# Altium PCB STM32F103RB最小系统.PcbDoc (part 2 of 2)
Units mil, origin at the board's own origin, x right, y up, seen from the top; angles counter-clockwise.
Board outline 1970 x 2120 mil, 2 copper layers (Top Layer, Bottom Layer); 27 components, 58 nets, 187 pads, 61 vias.
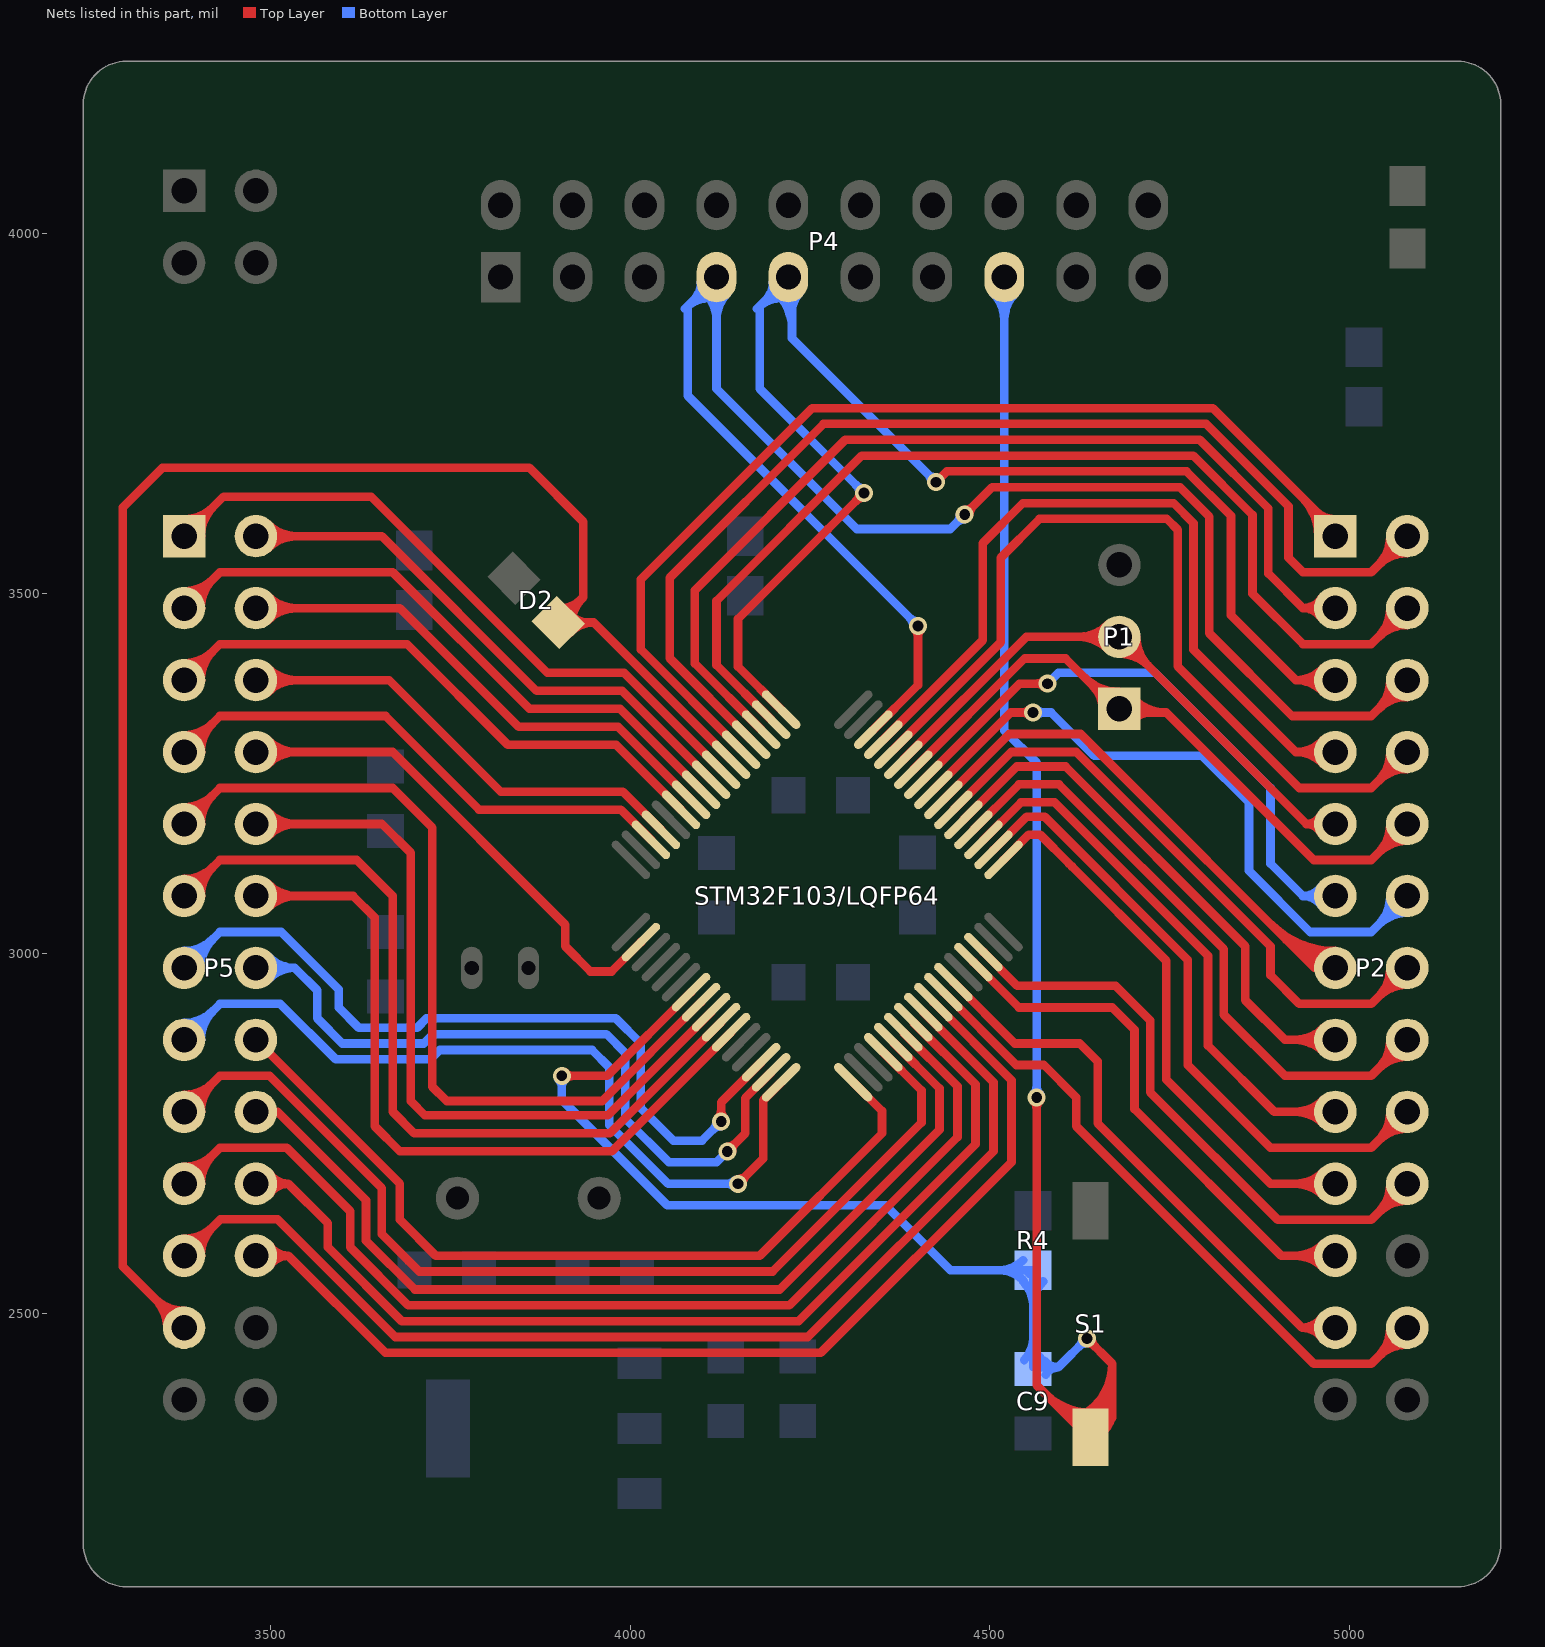
[diagram p2: the nets of this part, all layers, seen from the top]

## Via types
v1: diameter 25, hole 15, Top Layer to Bottom Layer, 61 vias

## Nets (pads, with @x,y where several pads share a name; then routed paths per layer and width w, separated by ;. In a path a pad name is that pad's centre, name@x,y a point inside that pad or via, vN(x,y) a via of type N, cw(c..) or ccw(c..) an arc to the next point about the centre after c; other vN are vias at no path point) (continued)
NRST: C9.2 P4.15 R4.1 S1.1 STM32F103/LQFP64.7 | length 4817.7
  Top Layer w12: v1(3905,2830) 3968.24,2830 STM32F103/LQFP64.7@4084.62,2946.37 ; v1(4565,2800) 4565,2400 4640,2325 4670,2355 4670,2430 ; v1(4635,2465) 4670,2430 ; 3920.69,2830 cw(c3920.69,2845.69) 3909.6,2834.6 ccw(c3920.69,2845.69) 3920.69,2830 ; 3920.69,2830 ccw(c3920.69,2814.31) 3909.6,2825.4 cw(c3920.69,2814.31) 3920.69,2830 ; 4565,2784.31 cw(c4580.69,2784.31) 4569.6,2795.4 ccw(c4580.69,2784.31) 4565,2784.31 ; 4565,2784.31 ccw(c4549.31,2784.31) 4560.4,2795.4 cw(c4549.31,2784.31) 4565,2784.31 ; 4646.1,2453.9 cw(c4657.19,2465) 4641.5,2465 ccw(c4657.19,2465) 4646.1,2453.9 ; 4646.1,2453.9 ccw(c4635,2442.81) 4635,2458.5 cw(c4635,2442.81) 4646.1,2453.9 ; 4670,2430 cw(c4586.77,2430) 4630.11,2358.94 ccw(c4586.77,2430) 4670,2430 ; 4577.32,2387.68 ccw(c4640,2450.36) 4640,2361.72 cw(c4640,2450.36) 4577.32,2387.68 ; 4597.81,2367.19 ccw(c4640,2409.39) 4640,2349.72 cw(c4640,2409.39) 4597.81,2367.19 ; S1.1@4636.36,2348.69 ccw(c4599.8,2408.62) 4670,2408.62 cw(c4599.8,2408.62) S1.1@4636.36,2348.69 ; S1.1@4642.6,2338.45 ccw(c4612.84,2387.25) 4670,2387.25 cw(c4612.84,2387.25) S1.1@4642.6,2338.45 ; S1.1@4648.85,2328.2 ccw(c4625.88,2365.87) 4670,2365.87 cw(c4625.88,2365.87) S1.1@4648.85,2328.2
  Bottom Layer w12: v1(3905,2830) 3905,2796.66 4051.66,2650 4355,2650 4445,2560 R4.1@4550,2560 ; P4.15@4515,3925 P4.15@4520,3920 ; P4.15@4520,3940 4520,3310 4565,3265 v1(4565,2800) ; R4.1@4555,2555 R4.1@4550,2560 ; v1(4635,2465) 4595,2425 ; 3905,2814.31 cw(c3920.69,2814.31) 3909.6,2825.4 ccw(c3920.69,2814.31) 3905,2814.31 ; 3905,2814.31 ccw(c3889.31,2814.31) 3900.4,2825.4 cw(c3889.31,2814.31) 3905,2814.31 ; 4512.7,2560 cw(c4512.7,2512.7) 4546.15,2546.15 ccw(c4512.7,2512.7) 4512.7,2560 ; 4512.7,2560 ccw(c4512.7,2607.3) 4546.15,2573.85 cw(c4512.7,2607.3) 4512.7,2560 ; 4520,3880.59 cw(c4571.91,3880.59) 4535.2,3917.3 ccw(c4571.91,3880.59) 4520,3880.59 ; 4520,3880.59 ccw(c4468.09,3880.59) 4504.8,3917.3 cw(c4468.09,3880.59) 4520,3880.59 ; R4.1@4550,2560 R4.1@4560,2560 4560,2425 4595,2425 ; 4560,2465.22 cw(c4517.46,2465.22) 4547.54,2435.14 ccw(c4517.46,2465.22) 4560,2465.22 ; 4560,2465.22 ccw(c4602.54,2465.22) 4572.46,2435.14 cw(c4602.54,2465.22) 4560,2465.22 ; 4560,2510.74 cw(c4607.3,2510.74) 4573.85,2544.18 ccw(c4607.3,2510.74) 4560,2510.74 ; 4560,2510.74 ccw(c4512.7,2510.74) 4546.15,2544.18 cw(c4512.7,2510.74) 4560,2510.74 ; 4565,2815.69 cw(c4549.31,2815.69) 4560.4,2804.6 ccw(c4549.31,2815.69) 4565,2815.69 ; 4565,2815.69 ccw(c4580.69,2815.69) 4569.6,2804.6 cw(c4580.69,2815.69) 4565,2815.69 ; 4595,2425 cw(c4595,2450.68) 4575.41,2434.07 ccw(c4595,2450.68) 4595,2425 ; 4595,2425 ccw(c4595,2405.3) 4577.56,2414.47 cw(c4595,2405.3) 4595,2425 ; 4623.9,2453.9 cw(c4635,2442.81) 4635,2458.5 ccw(c4635,2442.81) 4623.9,2453.9 ; 4623.9,2453.9 ccw(c4612.81,2465) 4628.5,2465 cw(c4612.81,2465) 4623.9,2453.9
PA0: P5.13 STM32F103/LQFP64.14 | length 1358.9
  Top Layer w12: v1(4126.56,2766.56) 4126.56,2793.44 STM32F103/LQFP64.14@4182.05,2848.94 ; 4126.56,2782.25 cw(c4110.86,2782.25) 4121.96,2771.15 ccw(c4110.86,2782.25) 4126.56,2782.25 ; 4126.56,2782.25 ccw(c4142.25,2782.25) 4131.15,2771.15 cw(c4142.25,2782.25) 4126.56,2782.25
  Bottom Layer w12: P5.13@3380,2980 3430,3030 3515,3030 3595,2950 3595,2925 3623,2897 3704.05,2897 3717.05,2910 3980,2910 4015,2875 4015,2785 4060,2740 4100,2740 v1(4126.56,2766.56) ; 3420.16,3020.16 cw(c3380,3060.33) 3380,3003.53 ccw(c3380,3060.33) 3420.16,3020.16 ; 3420.16,3020.16 ccw(c3460.33,2980) 3403.53,2980 cw(c3460.33,2980) 3420.16,3020.16 ; 4115.46,2755.46 cw(c4126.56,2744.36) 4126.56,2760.06 ccw(c4126.56,2744.36) 4115.46,2755.46 ; 4115.46,2755.46 ccw(c4104.36,2766.56) 4120.06,2766.56 cw(c4104.36,2766.56) 4115.46,2755.46
PA1: P5.14 STM32F103/LQFP64.15 | length 1207.9
  Top Layer w12: v1(4135,2725) 4160,2750 4160,2799.05 STM32F103/LQFP64.15@4195.97,2835.02 ; 4146.1,2736.1 cw(c4135,2747.19) 4135,2731.5 ccw(c4135,2747.19) 4146.1,2736.1 ; 4146.1,2736.1 ccw(c4157.19,2725) 4141.5,2725 cw(c4157.19,2725) 4146.1,2736.1
  Bottom Layer w12: P5.14@3480,2980 3533.89,2980 ; 4053.89,2710 3993,2770.89 3993,2862 3967,2888 3726.16,2888 3713.16,2875 3600,2875 3565,2910 3565,2948.89 3533.89,2980 ; 4055,2710 4120,2710 v1(4135,2725) ; 3533.88,2980 cw(c3533.88,3029.94) 3497.26,2995.99 ccw(c3533.88,3029.94) 3533.88,2980 ; 3533.88,2980 ccw(c3533.88,2930.06) 3497.26,2964.01 cw(c3533.88,2930.06) 3533.88,2980
PA2: P5.15 STM32F103/LQFP64.16 | length 1395
  Top Layer w12: v1(4150,2680) 4185,2715 4185,2796.21 STM32F103/LQFP64.16@4209.89,2821.1 ; 4161.1,2691.1 cw(c4150,2702.19) 4150,2686.5 ccw(c4150,2702.19) 4161.1,2691.1 ; 4161.1,2691.1 ccw(c4172.19,2680) 4156.5,2680 cw(c4172.19,2680) 4161.1,2691.1
  Bottom Layer w12: P5.15@3380,2880 3430,2930 3513.89,2930 3590.89,2853 3722.27,2853 3735.27,2866 3947,2866 3971,2842 3971,2761.77 4051.39,2681.39 4052.77,2680 v1(4150,2680) ; 3420.16,2920.16 cw(c3380,2960.33) 3380,2903.53 ccw(c3380,2960.33) 3420.16,2920.16 ; 3420.16,2920.16 ccw(c3460.33,2880) 3403.53,2880 cw(c3460.33,2880) 3420.16,2920.16 ; 4134.31,2680 cw(c4134.31,2664.31) 4145.4,2675.4 ccw(c4134.31,2664.31) 4134.31,2680 ; 4134.31,2680 ccw(c4134.31,2695.69) 4145.4,2684.6 cw(c4134.31,2695.69) 4134.31,2680
PA3: P5.16 STM32F103/LQFP64.17 | length 1181.6
  Top Layer w12: P5.16@3480,2880 3680,2680 3680,2630 3730,2580 4180,2580 4350,2750 4350,2781.21 STM32F103/LQFP64.17@4310.11,2821.1
PA4: P5.17 STM32F103/LQFP64.20 | length 1587.5
  Top Layer w12: P5.17@3380,2780 3430,2830 3498.89,2830 3655,2673.89 3655,2610 3690,2575 ; 3692.5,2572.5 3690,2575 ; 4189.11,2558 4185,2558 ; STM32F103/LQFP64.20@4351.87,2862.86 4405,2809.73 4405,2765 4198,2558 4185,2558 ; 3420.16,2820.16 cw(c3380,2860.33) 3380,2803.53 ccw(c3380,2860.33) 3420.16,2820.16 ; 3420.16,2820.16 ccw(c3460.33,2780) 3403.53,2780 cw(c3460.33,2780) 3420.16,2820.16 ; 3690,2575 3707,2558 4185,2558
PA5: P5.18 STM32F103/LQFP64.21 | length 1325.5
  Top Layer w12: P5.18@3480,2780 3510,2780 3633,2657 3633,2600.89 3700.89,2533 4208,2533 4430,2755 4430,2812.56 STM32F103/LQFP64.21@4365.79,2876.78
PA6: P5.19 STM32F103/LQFP64.22 | length 1668
  Top Layer w12: P5.19@3380,2680 3430,2730 3522.77,2730 3611,2641.77 3611,2591.77 3691.77,2511 4221,2511 4455,2745 4455,2815.4 STM32F103/LQFP64.22@4379.71,2890.7 ; 3420.16,2720.16 cw(c3380,2760.33) 3380,2703.53 ccw(c3380,2760.33) 3420.16,2720.16 ; 3420.16,2720.16 ccw(c3460.33,2680) 3403.53,2680 cw(c3460.33,2680) 3420.16,2720.16
PA7: P5.20 STM32F103/LQFP64.23 | length 1526.4
  Top Layer w12: P5.20@3480,2680 3525,2680 ; STM32F103/LQFP64.23@4393.63,2904.62 4480,2818.24 4480,2735 4234,2489 3682.66,2489 3580,2591.66 3580,2625 3525,2680 ; 3525,2680 cw(c3525,2711.27) 3499.32,2693.43 ccw(c3525,2711.27) 3525,2680 ; 3525,2680 ccw(c3525,2648.73) 3499.32,2666.57 cw(c3525,2648.73) 3525,2680
PA8: P2.11 STM32F103/LQFP64.41 | length 993.7
  Top Layer w12: STM32F103/LQFP64.41@4407.55,3241.47 4541.08,3375 v1(4580,3375) ; 4564.31,3375 cw(c4564.31,3359.31) 4575.4,3370.4 ccw(c4564.31,3359.31) 4564.31,3375 ; 4564.31,3375 ccw(c4564.31,3390.69) 4575.4,3379.6 cw(c4564.31,3390.69) 4564.31,3375
  Bottom Layer w12: v1(4580,3375) 4595,3390 4730,3390 4890,3230 4890,3125 4935,3080 ; P2.11@4980,3080 4935,3080 ; 4935,3080 cw(c4935,3048.73) 4960.68,3066.57 ccw(c4935,3048.73) 4935,3080 ; 4935,3080 ccw(c4935,3111.27) 4960.68,3093.43 cw(c4935,3111.27) 4935,3080
PA9: P1.1 P2.10 STM32F103/LQFP64.42 | length 1556.8
  Top Layer w12: STM32F103/LQFP64.42@4393.63,3255.38 4548.24,3410 4605,3410 4680,3335 4745,3335 ; P1.1@4660,3320 P1.1@4660,3335 ; P2.10@5080,3180 5030,3130 4950,3130 4745,3335 ; 4745,3335 cw(c4745,3399.78) 4697.32,3355.93 ccw(c4745,3399.78) 4745,3335 ; 5039.84,3139.84 cw(c5080,3099.67) 5080,3156.47 ccw(c5080,3099.67) 5039.84,3139.84 ; 5039.84,3139.84 ccw(c4999.67,3180) 5056.47,3180 cw(c4999.67,3180) 5039.84,3139.84 ; 4631.3,3383.7 ccw(c4680,3432.4) 4680,3363.53 cw(c4680,3432.4) 4631.3,3383.7 ; 4643.37,3371.63 cw(c4611.74,3340) 4656.47,3340 ccw(c4611.74,3340) 4643.37,3371.63 ; P1.1@4651.79,3363.21 ccw(c4680,3391.43) 4680,3351.53 cw(c4680,3391.43) P1.1@4651.79,3363.21 ; P1.1@4688.48,3347.8 ccw(c4717.66,3374.63) 4717.66,3335 cw(c4717.66,3374.63) P1.1@4688.48,3347.8 ; P1.1@4696.64,3323.36 cw(c4724.73,3295.27) 4724.73,3335 ccw(c4724.73,3295.27) P1.1@4696.64,3323.36
PA10: P1.2 P2.9 STM32F103/LQFP64.43 | length 1230.2
  Top Layer w12: STM32F103/LQFP64.43@4379.71,3269.3 4550.4,3440 P1.2@4680,3440 4940,3180 ; P2.9@4980,3180 4940,3180 ; 4623.2,3440 cw(c4623.2,3383.2) 4663.36,3423.36 ccw(c4623.2,3383.2) 4623.2,3440 ; 4623.2,3440 ccw(c4623.2,3496.8) 4663.36,3456.64 cw(c4623.2,3496.8) 4623.2,3440 ; 4720.16,3399.84 cw(c4760.33,3440) 4703.53,3440 ccw(c4760.33,3440) 4720.16,3399.84 ; 4720.16,3399.84 ccw(c4680,3359.67) 4680,3416.47 cw(c4680,3359.67) 4720.16,3399.84 ; 4940,3180 cw(c4940,3157.76) 4959.44,3168.57 ccw(c4940,3157.76) 4940,3180 ; 4940,3180 ccw(c4940,3202.24) 4959.44,3191.43 cw(c4940,3202.24) 4940,3180
PA11: P2.8 STM32F103/LQFP64.44 | length 1381.3
  Top Layer w12: STM32F103/LQFP64.44@4365.79,3283.22 4515,3432.44 4515,3550 4569,3604 4746,3604 4761,3589 4761,3399 4930,3230 5030,3230 P2.8@5080,3280 ; 5039.84,3239.84 cw(c5080,3199.67) 5080,3256.47 ccw(c5080,3199.67) 5039.84,3239.84 ; 5039.84,3239.84 ccw(c4999.67,3280) 5056.47,3280 cw(c4999.67,3280) 5039.84,3239.84
PA12: P2.7 STM32F103/LQFP64.45 | length 1259.6
  Top Layer w12: STM32F103/LQFP64.45@4351.87,3297.14 4490,3435.28 4490,3570 4546,3626 4755.11,3626 4783,3598.11 4783,3422 4925,3280 ; P2.7@4980,3280 4925,3280 ; 4925,3280 cw(c4925,3227.48) 4962.98,3263.75 ccw(c4925,3227.48) 4925,3280 ; 4925,3280 ccw(c4925,3332.52) 4962.98,3296.25 cw(c4925,3332.52) 4925,3280
PA13: P2.6 P4.7 STM32F103/LQFP64.46 | length 3008.8
  Top Layer w12: STM32F103/LQFP64.46@4337.95,3311.06 4400,3373.11 v1(4400,3455) ; v1(4465,3610) 4503,3648 4764.23,3648 4805,3607.23 4805,3445 4920,3330 5030,3330 P2.6@5080,3380 ; 4400,3439.31 cw(c4415.69,3439.31) 4404.6,3450.4 ccw(c4415.69,3439.31) 4400,3439.31 ; 4400,3439.31 ccw(c4384.31,3439.31) 4395.4,3450.4 cw(c4384.31,3439.31) 4400,3439.31 ; 4476.1,3621.1 cw(c4465,3632.19) 4465,3616.5 ccw(c4465,3632.19) 4476.1,3621.1 ; 4476.1,3621.1 ccw(c4487.19,3610) 4471.5,3610 cw(c4487.19,3610) 4476.1,3621.1 ; 5039.84,3339.84 cw(c5080,3299.67) 5080,3356.47 ccw(c5080,3299.67) 5039.84,3339.84 ; 5039.84,3339.84 ccw(c4999.67,3380) 5056.47,3380 cw(c4999.67,3380) 5039.84,3339.84
  Bottom Layer w12: v1(4400,3455) 4080,3775 4080,3900 P4.7@4120,3940 4120,3785 4315,3590 4445,3590 v1(4465,3610) ; 4120,3880.59 cw(c4171.91,3880.59) 4135.2,3917.3 ccw(c4171.91,3880.59) 4120,3880.59 ; 4120,3880.59 ccw(c4068.09,3880.59) 4104.8,3917.3 cw(c4068.09,3880.59) 4120,3880.59 ; 4388.9,3466.1 cw(c4377.81,3455) 4393.5,3455 ccw(c4377.81,3455) 4388.9,3466.1 ; 4388.9,3466.1 ccw(c4400,3477.19) 4400,3461.5 cw(c4400,3477.19) 4388.9,3466.1 ; 4453.9,3598.9 cw(c4465,3587.81) 4465,3603.5 ccw(c4465,3587.81) 4453.9,3598.9 ; 4453.9,3598.9 ccw(c4442.81,3610) 4458.5,3610 cw(c4442.81,3610) 4453.9,3598.9 ; 4076.25,3896.25 cw(c4112.73,3859.77) 4117.86,3911.11 ccw(c4112.73,3859.77) 4076.25,3896.25 ; 4088.6,3908.6 ccw(c4064.7,3932.5) 4098.5,3932.5 cw(c4064.7,3932.5) 4088.6,3908.6 ; 4094.16,3914.16 cw(c4115.99,3892.33) 4119.06,3923.05 ccw(c4115.99,3892.33) 4094.16,3914.16
PA14: P2.5 P4.9 STM32F103/LQFP64.49 | length 2657.1
  Top Layer w12: STM32F103/LQFP64.49@4209.89,3338.9 4150,3398.79 4150,3465 4275,3590 ; 4280,3595 4275,3590 ; v1(4325,3640) 4275,3590 ; v1(4425,3655) 4440,3670 4773.34,3670 4835,3608.34 4835,3470 4925,3380 ; P2.5@4980,3380 4925,3380 ; 4313.9,3628.9 cw(c4325,3617.81) 4325,3633.5 ccw(c4325,3617.81) 4313.9,3628.9 ; 4313.9,3628.9 ccw(c4302.81,3640) 4318.5,3640 cw(c4302.81,3640) 4313.9,3628.9 ; 4925,3380 cw(c4925,3327.48) 4962.98,3363.75 ccw(c4925,3327.48) 4925,3380 ; 4925,3380 ccw(c4925,3432.52) 4962.98,3396.25 cw(c4925,3432.52) 4925,3380
  Bottom Layer w12: v1(4325,3640) 4180,3785 4180,3900 P4.9@4220,3940 4225,3935 4225,3855 v1(4425,3655) ; 4313.9,3651.1 cw(c4302.81,3640) 4318.5,3640 ccw(c4302.81,3640) 4313.9,3651.1 ; 4313.9,3651.1 ccw(c4325,3662.19) 4325,3646.5 cw(c4325,3662.19) 4313.9,3651.1 ; 4413.9,3666.1 cw(c4402.81,3655) 4418.5,3655 ccw(c4402.81,3655) 4413.9,3666.1 ; 4413.9,3666.1 ccw(c4425,3677.19) 4425,3661.5 cw(c4425,3677.19) 4413.9,3666.1 ; 4176.25,3896.25 cw(c4212.73,3859.77) 4217.86,3911.11 ccw(c4212.73,3859.77) 4176.25,3896.25 ; 4188.6,3908.6 ccw(c4164.7,3932.5) 4198.5,3932.5 cw(c4164.7,3932.5) 4188.6,3908.6 ; 4194.16,3914.16 cw(c4215.99,3892.33) 4219.06,3923.05 ccw(c4215.99,3892.33) 4194.16,3914.16 ; P4.9@4204.8,3917.3 cw(c4156.02,3868.52) 4225,3868.52 ccw(c4156.02,3868.52) P4.9@4204.8,3917.3 ; P4.9@4213.28,3925.78 cw(c4184.99,3897.49) 4225,3897.49 ccw(c4184.99,3897.49) P4.9@4213.28,3925.78 ; 4225,3892.67 cw(c4259.83,3892.67) 4235.2,3917.3 ccw(c4259.83,3892.67) 4225,3892.67
PA15: P2.4 STM32F103/LQFP64.50 | length 1611.9
  Top Layer w12: STM32F103/LQFP64.50@4195.97,3324.98 4120,3400.95 4120,3490 4322,3692 4782.45,3692 4865,3609.45 4865,3500 4935,3430 5030,3430 P2.4@5080,3480 ; 5039.84,3439.84 cw(c5080,3399.67) 5080,3456.47 ccw(c5080,3399.67) 5039.84,3439.84 ; 5039.84,3439.84 ccw(c4999.67,3480) 5056.47,3480 cw(c4999.67,3480) 5039.84,3439.84
PB0: P2.24 STM32F103/LQFP64.26 | length 1081.1
  Top Layer w12: STM32F103/LQFP64.26@4435.38,2946.37 4536.76,2845 4575,2845 4620,2800 4620,2760 4950,2430 5030,2430 P2.24@5080,2480 ; 5039.84,2439.84 cw(c5080,2399.67) 5080,2456.47 ccw(c5080,2399.67) 5039.84,2439.84 ; 5039.84,2439.84 ccw(c4999.67,2480) 5056.47,2480 cw(c4999.67,2480) 5039.84,2439.84
PB1: P2.23 STM32F103/LQFP64.27 | length 906.2
  Top Layer w12: STM32F103/LQFP64.27@4449.3,2960.29 4534.6,2875 4625,2875 4650,2850 4650,2763.89 4933.89,2480 ; P2.23@4980,2480 4933.89,2480 ; 4933.89,2480 cw(c4933.89,2446.58) 4960.95,2466.19 ccw(c4933.89,2446.58) 4933.89,2480 ; 4933.89,2480 ccw(c4933.89,2513.42) 4960.95,2493.81 cw(c4933.89,2513.42) 4933.89,2480
PB3: P5.1 STM32F103/LQFP64.55 | length 1104.8
  Top Layer w12: P5.1@3380,3580 3435,3635 3640,3635 3885,3390 3991.76,3390 STM32F103/LQFP64.55@4126.37,3255.38 ; 3420.16,3620.16 cw(c3380,3660.33) 3380,3603.53 ccw(c3380,3660.33) 3420.16,3620.16 ; 3420.16,3620.16 ccw(c3460.33,3580) 3403.53,3580 cw(c3460.33,3580) 3420.16,3620.16
PB4: P5.2 STM32F103/LQFP64.56 | length 951.1
  Top Layer w12: P5.2@3480,3580 3655,3580 3870,3365 3988.92,3365 STM32F103/LQFP64.56@4112.45,3241.47 ; 3536.8,3580 cw(c3536.8,3636.8) 3496.64,3596.64 ccw(c3536.8,3636.8) 3536.8,3580 ; 3536.8,3580 ccw(c3536.8,3523.2) 3496.64,3563.36 cw(c3536.8,3523.2) 3536.8,3580
PB5: P5.3 STM32F103/LQFP64.57 | length 1043
  Top Layer w12: P5.3@3380,3480 3430,3530 3670,3530 3860,3340 3986.08,3340 STM32F103/LQFP64.57@4098.53,3227.55 ; 3420.16,3520.16 cw(c3380,3560.33) 3380,3503.53 ccw(c3380,3560.33) 3420.16,3520.16 ; 3420.16,3520.16 ccw(c3460.33,3480) 3403.53,3480 cw(c3460.33,3480) 3420.16,3520.16
PB6: P5.4 STM32F103/LQFP64.58 | length 893.4
  Top Layer w12: P5.4@3480,3480 3680,3480 3845,3315 3983.24,3315 STM32F103/LQFP64.58@4084.62,3213.63 ; 3536.8,3480 cw(c3536.8,3536.8) 3496.64,3496.64 ccw(c3536.8,3536.8) 3536.8,3480 ; 3536.8,3480 ccw(c3536.8,3423.2) 3496.64,3463.36 cw(c3536.8,3423.2) 3536.8,3480
PB7: P5.5 STM32F103/LQFP64.59 | length 985.2
  Top Layer w12: P5.5@3380,3380 3430,3430 3690,3430 3830,3290 3980.4,3290 STM32F103/LQFP64.59@4070.7,3199.71 ; 3420.16,3420.16 cw(c3380,3460.33) 3380,3403.53 ccw(c3380,3460.33) 3420.16,3420.16 ; 3420.16,3420.16 ccw(c3460.33,3380) 3403.53,3380 cw(c3460.33,3380) 3420.16,3420.16
PB8: P5.6 STM32F103/LQFP64.61 | length 827.5
  Top Layer w12: P5.6@3480,3380 3665,3380 3820,3225 3989.73,3225 STM32F103/LQFP64.61@4042.86,3171.87 ; 3536.8,3380 cw(c3536.8,3436.8) 3496.64,3396.64 ccw(c3536.8,3436.8) 3536.8,3380 ; 3536.8,3380 ccw(c3536.8,3323.2) 3496.64,3363.36 cw(c3536.8,3323.2) 3536.8,3380
PB9: P5.7 STM32F103/LQFP64.62 | length 919.4
  Top Layer w12: P5.7@3380,3280 3430,3330 3660,3330 3790,3200 3986.89,3200 STM32F103/LQFP64.62@4028.94,3157.95 ; 3420.16,3320.16 cw(c3380,3360.33) 3380,3303.53 ccw(c3380,3360.33) 3420.16,3320.16 ; 3420.16,3320.16 ccw(c3460.33,3280) 3403.53,3280 cw(c3460.33,3280) 3420.16,3320.16
PB10: P2.21 STM32F103/LQFP64.29 | length 914.8
  Top Layer w12: STM32F103/LQFP64.29@4477.14,2988.13 4540.28,2925 4670,2925 4701,2894 4701,2784 4905,2580 P2.21@4980,2580 ; 4923.2,2580 cw(c4923.2,2523.2) 4963.36,2563.36 ccw(c4923.2,2523.2) 4923.2,2580 ; 4923.2,2580 ccw(c4923.2,2636.8) 4963.36,2596.64 cw(c4923.2,2636.8) 4923.2,2580
PB11: P2.20 STM32F103/LQFP64.30 | length 1000.8
  Top Layer w12: STM32F103/LQFP64.30@4491.06,3002.05 4538.11,2955 4675,2955 4723,2907 4723,2807 4900,2630 5030,2630 P2.20@5080,2680 ; 5039.84,2639.84 cw(c5080,2599.67) 5080,2656.47 ccw(c5080,2599.67) 5039.84,2639.84 ; 5039.84,2639.84 ccw(c4999.67,2680) 5056.47,2680 cw(c4999.67,2680) 5039.84,2639.84
PB12: P2.19 STM32F103/LQFP64.33 | length 958.6
  Top Layer w12: STM32F103/LQFP64.33@4518.9,3130.11 4553.79,3165 4570,3165 4610,3125 ; 4615,3120 4610,3125 ; P2.19@4980,2680 4890,2680 4745,2825 4745,2990 4610,3125 ; 4923.2,2680 cw(c4923.2,2623.2) 4963.36,2663.36 ccw(c4923.2,2623.2) 4923.2,2680 ; 4923.2,2680 ccw(c4923.2,2736.8) 4963.36,2696.64 cw(c4923.2,2736.8) 4923.2,2680
PB13: P2.18 STM32F103/LQFP64.34 | length 1069.3
  Top Layer w12: STM32F103/LQFP64.34@4504.98,3144.03 4550.95,3190 4576.11,3190 4775,2991.11 4775,2845 4890,2730 5030,2730 P2.18@5080,2780 ; 5039.84,2739.84 cw(c5080,2699.67) 5080,2756.47 ccw(c5080,2699.67) 5039.84,2739.84 ; 5039.84,2739.84 ccw(c4999.67,2780) 5056.47,2780 cw(c4999.67,2780) 5039.84,2739.84
PB14: P2.17 STM32F103/LQFP64.35 | length 940.3
  Top Layer w12: STM32F103/LQFP64.35@4491.06,3157.95 4543.11,3210 4590,3210 4803,2997 4803,2872 4895,2780 P2.17@4980,2780 ; 4923.2,2780 cw(c4923.2,2723.2) 4963.36,2763.36 ccw(c4923.2,2723.2) 4923.2,2780 ; 4923.2,2780 ccw(c4923.2,2836.8) 4963.36,2796.64 cw(c4923.2,2836.8) 4923.2,2780
PB15: P2.16 STM32F103/LQFP64.36 | length 1049.3
  Top Layer w12: STM32F103/LQFP64.36@4477.14,3171.87 4540.28,3235 4596.11,3235 4825,3006.11 4825,2915 4910,2830 5030,2830 P2.16@5080,2880 ; 5039.84,2839.84 cw(c5080,2799.67) 5080,2856.47 ccw(c5080,2799.67) 5039.84,2839.84 ; 5039.84,2839.84 ccw(c4999.67,2880) 5056.47,2880 cw(c4999.67,2880) 5039.84,2839.84
PC0: P5.9 STM32F103/LQFP64.8 | length 1365.7
  Top Layer w12: P5.9@3380,3180 3430,3230 3670,3230 3725,3175 3725,2815 3745,2795 3961.08,2795 STM32F103/LQFP64.8@4098.53,2932.45 ; 3420.16,3220.16 cw(c3380,3260.33) 3380,3203.53 ccw(c3380,3260.33) 3420.16,3220.16 ; 3420.16,3220.16 ccw(c3460.33,3180) 3403.53,3180 cw(c3460.33,3180) 3420.16,3220.16
PC1: P5.10 STM32F103/LQFP64.9 | length 1240.2
  Top Layer w12: P5.10@3480,3180 3655,3180 3695,3140 3695,2795 3715,2775 3968.92,2775 STM32F103/LQFP64.9@4112.45,2918.53 ; 3536.8,3180 cw(c3536.8,3236.8) 3496.64,3196.64 ccw(c3536.8,3236.8) 3536.8,3180 ; 3536.8,3180 ccw(c3536.8,3123.2) 3496.64,3163.36 cw(c3536.8,3123.2) 3536.8,3180
PC2: P5.11 STM32F103/LQFP64.10 | length 1342.7
  Top Layer w12: P5.11@3380,3080 3430,3130 3620,3130 3670,3080 3670,2780 3700,2750 3971.76,2750 STM32F103/LQFP64.10@4126.37,2904.62 ; 3420.16,3120.16 cw(c3380,3160.33) 3380,3103.53 ccw(c3380,3160.33) 3420.16,3120.16 ; 3420.16,3120.16 ccw(c3460.33,3080) 3403.53,3080 cw(c3460.33,3080) 3420.16,3120.16
PC3: P5.12 STM32F103/LQFP64.11 | length 1224.3
  Top Layer w12: P5.12@3480,3080 3615,3080 3645,3050 3645,2760 3680,2725 3974.6,2725 STM32F103/LQFP64.11@4140.29,2890.7 ; 3536.8,3080 cw(c3536.8,3136.8) 3496.64,3096.64 ccw(c3536.8,3136.8) 3536.8,3080 ; 3536.8,3080 ccw(c3536.8,3023.2) 3496.64,3063.36 cw(c3536.8,3023.2) 3536.8,3080
PC4: P5.21 STM32F103/LQFP64.24 | length 1732.9
  Top Layer w12: P5.21@3380,2580 3430.55,2630.55 3510,2630.55 3673.55,2467 4247,2467 4505,2725 4505,2821.08 STM32F103/LQFP64.24@4407.55,2918.53 ; 3420.16,2620.16 cw(c3380,2660.33) 3380,2603.53 ccw(c3380,2660.33) 3420.16,2620.16 ; 3420.16,2620.16 ccw(c3460.33,2580) 3403.53,2580 cw(c3460.33,2580) 3420.16,2620.16
PC5: P5.22 STM32F103/LQFP64.25 | length 1603.6
  Top Layer w12: P5.22@3480,2580 3525,2580 ; STM32F103/LQFP64.25@4421.47,2932.45 4530,2823.92 4530,2710 4265,2445 3660,2445 3525,2580 ; 3525,2580 cw(c3525,2611.27) 3499.32,2593.43 ccw(c3525,2611.27) 3525,2580 ; 3525,2580 ccw(c3525,2548.73) 3499.32,2566.57 cw(c3525,2548.73) 3525,2580
PC6: P2.15 STM32F103/LQFP64.37 | length 952.3
  Top Layer w12: STM32F103/LQFP64.37@4463.22,3185.79 4537.44,3260 4605,3260 4855,3010 4855,2935 4910,2880 P2.15@4980,2880 ; P2.15@4960,2880 P2.15@4980,2880 ; P2.15@4985,2880 P2.15@4980,2880 ; 4923.2,2880 cw(c4923.2,2823.2) 4963.36,2863.36 ccw(c4923.2,2823.2) 4923.2,2880 ; 4923.2,2880 ccw(c4923.2,2936.8) 4963.36,2896.64 cw(c4923.2,2936.8) 4923.2,2880
PC7: P2.14 STM32F103/LQFP64.38 | length 1031.5
  Top Layer w12: STM32F103/LQFP64.38@4449.3,3199.71 4529.6,3280 4620,3280 4890,3010 4890,2970 4930,2930 5030,2930 P2.14@5080,2980 ; 5039.84,2939.84 cw(c5080,2899.67) 5080,2956.47 ccw(c5080,2899.67) 5039.84,2939.84 ; 5039.84,2939.84 ccw(c4999.67,2980) 5056.47,2980 cw(c4999.67,2980) 5039.84,2939.84
PC8: P2.13 STM32F103/LQFP64.39 | length 1176.9
  Top Layer w12: STM32F103/LQFP64.39@4435.38,3213.63 4526.76,3305 4626.11,3305 4655.56,3275.56 4951.11,2980 P2.13@4980,2980 ; 4890.52,3040.59 ccw(c4980,3130.07) 4980,3003.53 cw(c4980,3130.07) 4890.52,3040.59 ; 4911.01,3020.11 ccw(c4980,3089.1) 4980,2991.53 cw(c4980,3089.1) 4911.01,3020.11 ; 4931.49,2999.62 ccw(c4980,3048.13) 4980,2979.53 cw(c4980,3048.13) 4931.49,2999.62
PC9: P2.12 STM32F103/LQFP64.40 | length 1182.8
  Top Layer w12: STM32F103/LQFP64.40@4421.47,3227.55 4528.92,3335 v1(4560,3335) ; 4544.31,3335 cw(c4544.31,3319.31) 4555.4,3330.4 ccw(c4544.31,3319.31) 4544.31,3335 ; 4544.31,3335 ccw(c4544.31,3350.69) 4555.4,3339.6 cw(c4544.31,3350.69) 4544.31,3335
  Bottom Layer w12: v1(4560,3335) 4585,3335 4645,3275 4795,3275 4860,3210 4860,3115 4945,3030 5030,3030 P2.12@5080,3080 ; 4575.69,3335 cw(c4575.69,3350.69) 4564.6,3339.6 ccw(c4575.69,3350.69) 4575.69,3335 ; 4575.69,3335 ccw(c4575.69,3319.31) 4564.6,3330.4 cw(c4575.69,3319.31) 4575.69,3335 ; 5039.84,3039.84 cw(c5080,2999.67) 5080,3056.47 ccw(c5080,2999.67) 5039.84,3039.84 ; 5039.84,3039.84 ccw(c4999.67,3080) 5056.47,3080 cw(c4999.67,3080) 5039.84,3039.84
PC10: P2.3 STM32F103/LQFP64.51 | length 1479.1
  Top Layer w12: STM32F103/LQFP64.51@4182.05,3311.06 4090,3403.11 4090,3505 4299,3714 4791.56,3714 4887,3618.56 4887,3528 4935,3480 ; P2.3@4980,3480 4935,3480 ; 4935,3480 cw(c4935,3448.73) 4960.68,3466.57 ccw(c4935,3448.73) 4935,3480 ; 4935,3480 ccw(c4935,3511.27) 4960.68,3493.43 cw(c4935,3511.27) 4935,3480
PC11: P2.2 STM32F103/LQFP64.52 | length 1712
  Top Layer w12: STM32F103/LQFP64.52@4168.13,3297.14 4055,3410.28 4055,3522.23 4268.77,3736 4800.68,3736 4915,3621.68 4915,3550 4935,3530 5030,3530 P2.2@5080,3580 ; 5039.84,3539.84 cw(c5080,3499.67) 5080,3556.47 ccw(c5080,3499.67) 5039.84,3539.84 ; 5039.84,3539.84 ccw(c4999.67,3580) 5056.47,3580 cw(c4999.67,3580) 5039.84,3539.84
PC12: P2.1 STM32F103/LQFP64.53 | length 1688
  Top Layer w12: STM32F103/LQFP64.53@4154.21,3283.22 4015,3422.44 4015,3520 4253,3758 4809.79,3758 4980,3587.79 P2.1@4980,3580 ; 4934.33,3633.46 cw(c4880.87,3580) 4956.47,3580 ccw(c4880.87,3580) 4934.33,3633.46 ; 4953.13,3614.66 ccw(c4980,3641.53) 4980,3603.53 cw(c4980,3641.53) 4953.13,3614.66 ; 4954.81,3612.97 cw(c4921.84,3580) 4968.47,3580 ccw(c4921.84,3580) 4954.81,3612.97
PC13: P5.8 STM32F103/LQFP64.2 | length 874.3
  Top Layer w12: P5.8@3480,3280 3670,3280 3910,3040 3910,3010 3945,2975 3974.05,2975 STM32F103/LQFP64.2@4015.02,3015.97 ; 3536.8,3280 cw(c3536.8,3336.8) 3496.64,3296.64 ccw(c3536.8,3336.8) 3536.8,3280 ; 3536.8,3280 ccw(c3536.8,3223.2) 3496.64,3263.36 cw(c3536.8,3223.2) 3536.8,3280
PD2: D2.2 P5.23 STM32F103/LQFP64.54 | length 2803.7
  Top Layer w12: P5.23@3380,2480 3295,2565 3295,3620 3350,3675 3860,3675 3935,3600 3935,3495 D2.2@3900,3460 3949.6,3460 ; STM32F103/LQFP64.54@4140.29,3269.3 3949.6,3460 ; 3339.84,2520.16 cw(c3299.67,2480) 3356.47,2480 ccw(c3299.67,2480) 3339.84,2520.16 ; 3339.84,2520.16 ccw(c3380,2560.33) 3380,2503.53 cw(c3380,2560.33) 3339.84,2520.16 ; 3932.44,3492.44 cw(c3900,3524.87) 3900,3479 ccw(c3900,3524.87) 3932.44,3492.44 ; 3932.44,3492.44 ccw(c3964.87,3460) 3919,3460 cw(c3964.87,3460) 3932.44,3492.44 ; 3949.59,3460 ccw(c3949.59,3413.73) 3915.72,3445.25 cw(c3949.59,3413.73) 3949.59,3460 ; D2.2@3915.24,3471.63 ccw(c3943.31,3499.69) 3943.31,3460 cw(c3943.31,3499.69) D2.2@3915.24,3471.63
pads on no net: P4.3 P4.5 P4.11 P4.13 P4.17 P4.19

## Polygon pours and split planes (outlines as drawn)
GND on Top Layer "Top Layer-No Net" (solid, remove dead copper, pour order 1000): 3215,4270 3215,2155 ccw(c3290,2155) 3290,2080 5145,2080 ccw(c5145,2180) 5245,2180 5245,2220 5245,4250 ccw(c5205,4250) 5205,4290
GND on Bottom Layer "Top Layer-No Net" (solid, remove dead copper, pour order 1001): 3195,4255 ccw(c3195,4210) 3150,4210 3150,1980 cw(c3205,1980) 3205,2035 5250,2035 ccw(c5250,2080) 5295,2080 5295,4340

## Keep-outs
Keep-Out Layer:
  lines w10: 5100,4230 5150,4230 cw(c5150,4180) 5200,4180 5200,2190 5200,2180 cw(c5150,2180) 5150,2130 5085,2130 3400,2130 3300,2130 cw(c3300,2180) 3250,2180 3250,4180 cw(c3300,4180) 3300,4230 3305,4230 5105,4230

## Silkscreen, mask and mechanical layers (free items; w line width, h text height)
Top Overlay:
  text "C12" at 4920,3565 h40 r90
  text "C11" at 5180,3565 h40 r90
  text "B3" at 3320,3555 h40 r90
  text "B4" at 3580,3555 h40 r90
  text "GND" at 4615,3520 h40 r90
  text "B5" at 3320,3455 h40 r90
  text "B6" at 3580,3455 h40 r90
  text "C10" at 4920,3450 h40 r90
  text "A15" at 5180,3450 h40 r90
  text "RX1" at 4615,3395 h40 r90
  text "B7" at 3320,3355 h40 r90
  text "B8" at 3580,3355 h40 r90
  text "A14" at 4920,3340 h40 r90
  text "A13" at 5180,3340 h40 r90
  text "TX1" at 4615,3265 h40 r90
  text "B9" at 3320,3255 h40 r90
  text "B10" at 3580,3240 h40 r90
  text "A11" at 5180,3240 h40 r90
  text "A12" at 4920,3230 h40 r90
  text "C1" at 3580,3155 h40 r90
  text "C0" at 3320,3150 h40 r90
  text "A9" at 5180,3150 h40 r90
  text "A10" at 4920,3120 h40 r90
  text "C9" at 5180,3060 h40 r90
  text "C2" at 3320,3055 h40 r90
  text "C3" at 3580,3055 h40 r90
  text "A8" at 4920,3040 h40 r90
  text "A1" at 3580,2965 h40 r90
  text "C7" at 5180,2965 h40 r90
  text "A0" at 3320,2955 h40 r90
  text "C8" at 4920,2955 h40 r90
  text "C6" at 4920,2860 h40 r90
  text "A2" at 3320,2850 h40 r90
  text "A3" at 3580,2850 h40 r90
  text "B15" at 5180,2850 h40 r90
  text "A4" at 3320,2755 h40 r90
  text "A5" at 3580,2755 h40 r90
  text "B14" at 4920,2745 h40 r90
  text "B13" at 5180,2735 h40 r90
  text "A6" at 3320,2655 h40 r90
  text "A7" at 3580,2655 h40 r90
  text "B12" at 4920,2630 h40 r90
  text "B11" at 5180,2625 h40 r90
  text "C5" at 3580,2560 h40 r90
  text "C4" at 3320,2555 h40 r90
  text "B2" at 5180,2530 h40 r90
  text "B10" at 4920,2510 h40 r90
  text "D2" at 3320,2445 h40 r90
  text "B1" at 4920,2440 h40 r90
  text "B0" at 5180,2435 h40 r90
  text "GND" at 3580,2425 h40 r90
  text "+5" at 3320,2325 h40 r90
  text "GND" at 4920,2305 h40 r90
  text "GND" at 5180,2305 h40 r90
  text "GND" at 3580,2300 h40 r90
  text "ZERO创新工作室" at 3735,2270 h120
Bottom Overlay:
  text "STM32_CorePad_V1.0" at 4840,3245 h100 r90

## Dimensions
5200,4235 to 5225,2135 on Keep-Out Layer
3245,2115 to 5200,2100 on Keep-Out Layer

## Text inside footprints (layer, text, board x,y; h text height)
P3: Top Overlay "BOOT1" at 3320,3810 h40 r90; Top Overlay "BOOT0" at 3580,3810 h40 r90; Top Overlay "GND" at 3580,4055 h40 r90; Top Overlay "GND" at 3320,4055 h40 r90